# Altium PCB PCB.PcbDoc
Units mil, origin at the board's own origin, x right, y up, seen from the top; angles counter-clockwise.
Board outline 2387.59 x 420.45 mil, 2 copper layers (Top Layer, Bottom Layer), stack 21 mil thick; 4 components, 12 nets, 31 pads, 24 vias.
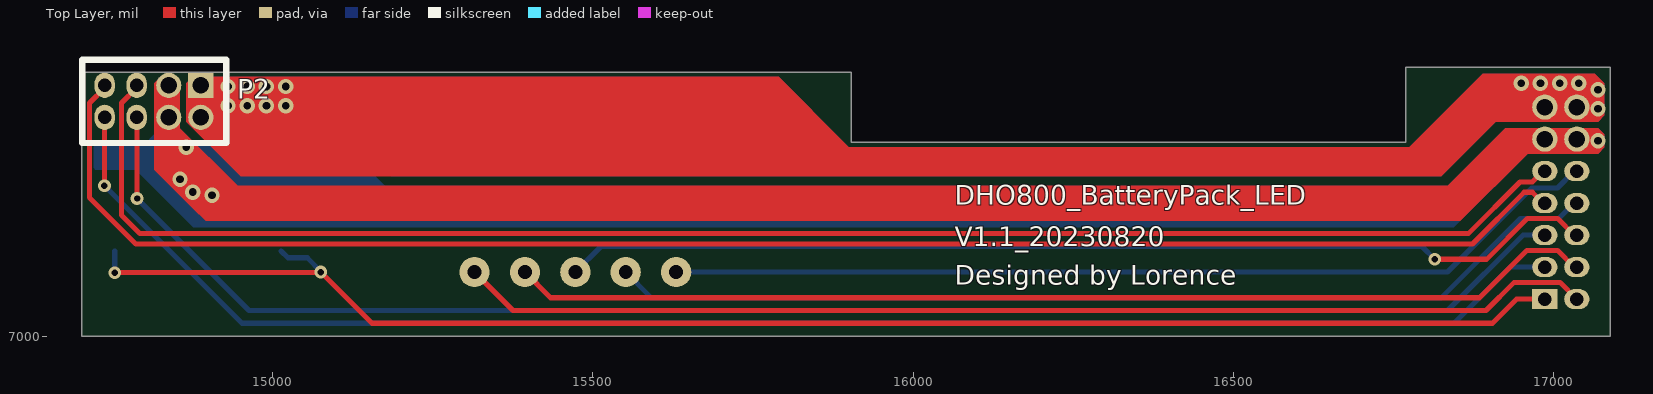
[diagram p0: Top Layer view]
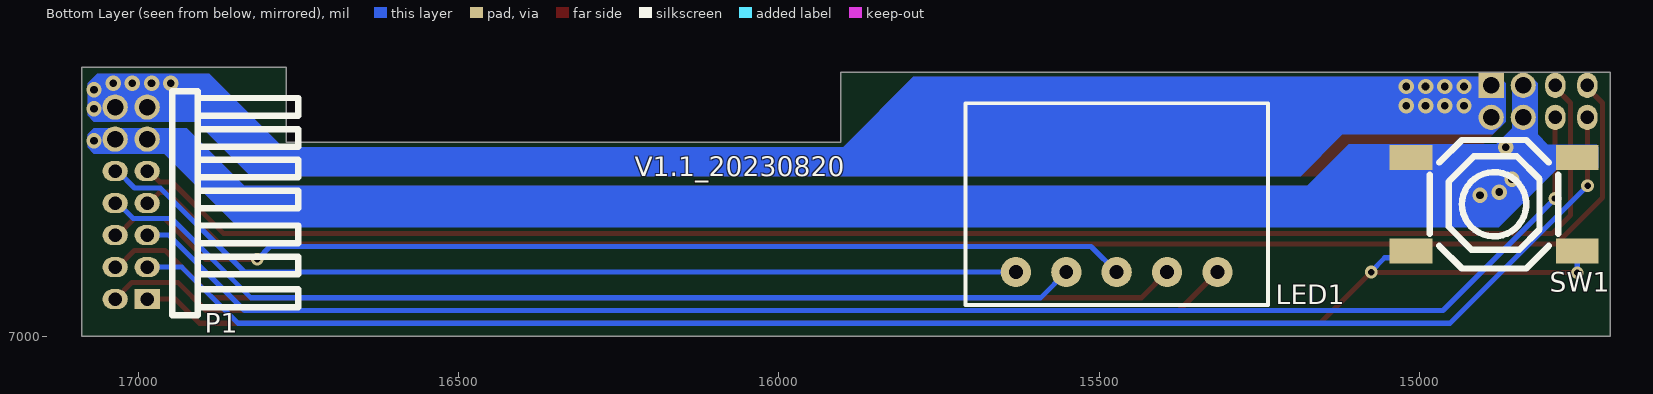
[diagram p1: Bottom Layer view, seen from below]

## Layer stack, top to bottom
Top Solder: solder mask 0.4, Solder Resist, Dk 3.5
Top Layer: signal copper 1.4
Dielectric 2: prepreg 2.8, PP-006, Dk 4.1
Dielectric 1: dielectric 12.6, FR-4, Dk 4.8
Dielectric 3: prepreg 2.8, PP-006, Dk 4.1
Bottom Layer: signal copper 1.4
Bottom Solder: solder mask 0.4, Solder Resist, Dk 3.5

## Board outline
14701.52,7236.79 14701.52,7412.46 15903.45,7412.46 15903.45,7302.51 16769.59,7302.51 16769.59,7420.33 17089.11,7420.33 17089.11,6999.88 14701.52,6999.88

## Design rules (kind name [scope] priority, off if disabled: settings)
Clearance [All] p1: gap=4 ignorepadtopadclearanceinfootprint=FALSE
DiffPairsRouting [All] p1: maxlimit=8 minlimit=8 mostfreqgap=8 toplayer_minwidth=8 toplayer_maxwidth=8 toplayer_prefwidth=8 bottomlayer_minwidth=8 bottomlayer_maxwidth=8 bottomlayer_prefwidth=8 maxuncoupledlength=500
HoleToHoleClearance [All] p1: gap=0 allowstackedmicrovias=TRUE
MinimumSolderMaskSliver [All] p1: minsoldermaskwidth=0
PlaneConnect [All] p1: planeconnectstyle=Direct reliefexpansion=20 reliefentries=4 reliefconductorwidth=10 reliefairgap=10
PolygonConnect [All] p1: connectstyle=Relief reliefconductorwidth=10 reliefentries=4 polygonreliefangle="90 Angle" airgapwidth=10
RoutingVias [All] p1: holewidth=10 width=20 viastyle="Through Hole" minholewidth=10 minwidth=20 maxholewidth=500 maxwidth=500
SilkToSilkClearance [All] p1: silktosilkclearance=0
SilkToSolderMaskClearance [IsPad] p1: minsilkscreentomaskgap=0 clearancetoexposedcopper=TRUE
SolderMaskExpansion [All] p1: expansion=4 istentingtop=FALSE
Width [All] p1: maxlimit=1000 minlimit=8 preferedwidth=8
24 further rules are at their usual default settings.

## Classes and differential pairs
differential pair BUSB: +BUSB_P -BUSB_N

## Components (designator, comment, footprint, x,y, rotation, side; value= is the part's Value field where it differs from the comment)
LED1 "188数码管" LED_188 15630,7100 r180 bottom locked
P1 "X1321WR-2x07J-C40D18" HDR-TH_14P-P1.27-H-M-R2-C7-S1.27-W7.5-N 17011.89,7207.72 r90 bottom locked
P2 "X1321WR-2x07J-C40D18" HDR-TH_8P-P1.27 14812.44,7366.72 r180 top locked
SW1 "TS-1187A-B-A-B" SW-SMD_4P-L5.1-W5.1-P3.70-LS6.5-TL-2 14883,7206 r0 bottom locked

## Footprints (in the part's own frame and the unit in brackets; to place one, negate y for a bottom-side part, rotate by r counter-clockwise, add the part's x,y. Pads: shape width x height; smd on the part's side, far side on the other; paste and mask are expansions set on the pad)
HDR-TH_8P-P1.27 [mm]
  rect 1x1 hole 0.65: 1(-1.905,-0.635)
  round 1 hole 0.65: 2(-1.905,0.635) 3(-0.635,-0.635) 4(-0.635,0.635)
  oval 0.8x1 hole 0.53: 5(0.635,-0.635) 6(0.635,0.635) 7(1.905,-0.635) 8(1.905,0.635)
  silkscreen extent -2.92,-1.65 2.79,1.65
HDR-TH_14P-P1.27-H-M-R2-C7-S1.27-W7.5-N [mm]
  rect 0.8x1 hole 0.53: 1(-3.81,-0.635)
  oval 0.8x1 hole 0.53: 2(-3.81,0.635) 3(-2.54,-0.635) 4(-2.54,0.635) 5(-1.27,-0.635) 6(-1.27,0.635) 7(0,-0.635) 8(0,0.635) 9(1.27,-0.635) 10(1.27,0.635)
  round 1 hole 0.65: 11(2.54,-0.635) 12(2.54,0.635) 13(3.81,-0.635) 14(3.81,0.635)
  silkscreen extent -4.44,-6.64 4.44,-1.63
LED_188 [mm] "188数码管"
  round 1.2 hole 0.55: 1(0,0) 2(2,0) 3(4,0) 4(6,0) 5(8,0)
  silkscreen extent -2,-1.3 10,6.7
SW-SMD_4P-L5.1-W5.1-P3.70-LS6.5-TL-2 [mm]
  rect 1.7x1 smd: 1(-3.3,1.85) 2(3.3,1.85) 3(-3.3,-1.85) 4(3.3,-1.85)
  silkscreen extent -2.55,-2.55 2.55,2.55

## Part data
P1: Current Rating (Max)=1A, JLCPCB Part Class="Extended Part", LCSC Part Name="1.27mm 2x7P 弯插 方针", Manufacturer="XKB Connectivity(中国星坤)", Operating Temperature Range=-40℃~+105℃, Voltage Rating (Max)=250V, Welding Temperature (Max)=260℃, Add into BOM=yes, Circluar Pins/Square Pins=方针, Contact Material=黄铜, Contact Plating=金, Convert to PCB=yes, Device=X1321WR-2x07J-C40D18, Insulation Height=1mm, Length of End Connection Pin=-, Length of Mating Pin=4mm, Manufacturer Part=X1321WR-2x07J-C40D18, Mounting Type=弯插, Name=X1321WR-2x07J-C40D18, Number of Pins=14, Number of Rows=2, Pin Structure=2x7P, Pitch=1.27mm, Row Spacing=1.27mm, Supplier=LCSC, Supplier Footprint=插件,P=1.27mm, Supplier Part=C2881827, Symbol=X1321WR-2X07J-C40D18
P2: library part 双排插针, "双排弯针2*4P", Current Rating (Max)=1A, JLCPCB Part Class="Extended Part", LCSC Part Name="1.27mm 2x7P 弯插 方针", Manufacturer="XKB Connectivity(中国星坤)", Operating Temperature Range=-40℃~+105℃, Voltage Rating (Max)=250V, Welding Temperature (Max)=260℃, Add into BOM=yes, Circluar Pins/Square Pins=方针, Contact Material=黄铜, Contact Plating=金, Convert to PCB=yes, Device=X1321WR-2x07J-C40D18, Insulation Height=1mm, Length of End Connection Pin=-, Length of Mating Pin=4mm, Manufacturer Part=X1321WR-2x07J-C40D18, Mounting Type=弯插, Name=X1321WR-2x07J-C40D18, Number of Pins=14, Number of Rows=2, Pin Structure=2x7P, Pitch=1.27mm, Row Spacing=1.27mm, Supplier=LCSC, Supplier Footprint=插件,P=1.27mm, Supplier Part=C2881827, Symbol=X1321WR-2X07J-C40D18
SW1: "按键", Actuator/Cap Color=金色, Contact Current=50mA, Insulation Resistance=-, JLCPCB Part Class="Basic Part", LCSC Part Name="5.1*5.1*1.5mm 立贴 轻触开关 防水金属头", Manufacturer="XKB Connectivity(中国星坤)", Operating Force=160gf, Operating Temperature=-30℃~+85℃, Voltage Rating (DC)=12V, Actuator Style=圆形按钮, Add into BOM=yes, Circuit=单刀单掷, Convert to PCB=yes, Datasheet=https://atta.szlcsc.com/upload/public/pdf/source/20200227/C318884_1F20165719E1C4CAA3E10C4C359C6E26.pdf, Device=TS-1187A-B-A-B, Manufacturer Part=TS-1187A-B-A-B, Mechanical Life=10万次, Mounting Style=立贴, Name=TS-1187A-B-A-B, Strike Gundam=否, Supplier=LCSC, Supplier Footprint=SMD, Supplier Part=C318884, Switch Height=1.5mm, Switch Length=5.1mm, Switch Width=5.1mm, Symbol=TS-1187A-B-A-B, With Lamp=无
LED1: Contributor=微雪智能, link=https://item.taobao.com/item.htm?spm=a230r.1.14.30.334f1cb7MZebUt&id=633499956474&ns=1&abbucket=12#detail, spicePre=U, spiceSymbolName=188数码管

## Via types
v1: diameter 24, hole 12, Top Layer to Bottom Layer, tented both sides, 19 vias
v2: diameter 20, hole 10, Top Layer to Bottom Layer, tented both sides, 5 vias

## Nets (pads, with @x,y where several pads share a name; then routed paths per layer and width w, separated by ;. In a path a pad name is that pad's centre, name@x,y a point inside that pad or via, vN(x,y) a via of type N, cw(c..) or ccw(c..) an arc to the next point about the centre after c; other vN are vias at no path point)
BUSB_N: P1.7 P2.7 | length 2528.9
  Top Layer w8: P2.7 14737.44,7387.77 14713.69,7364.03 14713.69,7216.31 14786,7144 16874,7144 16954.73,7224.73 16967.34,7224.73 16984.34,7207.73 P1.7
BUSB_P: P1.9 P2.5 | length 2488.3
  Top Layer w8: P2.5 14787.44,7387.77 14763.69,7364.03 14763.69,7188.93 14792.63,7160 16867.37,7160 16948.1,7240.73 16967.33,7240.73 16984.33,7257.73 P1.9
CC3: P1.5 P2.6 | length 2451
  Top Layer w8: P2.6 14787.72,7341.44 14787.72,7215.28 v2(14788,7215)
  Bottom Layer w8: P2.6@14787.44,7337.77 P2.6 ; v2(14788,7215) 14963,7040 16835,7040 16952.73,7157.73 P1.5
CC4: P1.3 P2.8 | length 2482.2
  Top Layer w8: v2(14737,7235) 14737.22,7235.22 14737.22,7341.5 P2.8
  Bottom Layer w8: v2(14737,7235) 14952,7020 16845,7020 16932.73,7107.73 P1.3
GND: P1.11 P1.12 P2.3 P2.4 SW1.3 SW1.4
  other v1: 14905,7220 14875,7225 14855,7245 14865,7295 17070,7305
KEY: P1.1 SW1.1 SW1.2 | length 2393.7
  Top Layer w8: v2(14753,7099) 14753.5,7099.5 15074.5,7099.5 v2(15075,7100) 15155,7020 16905,7020 16942.73,7057.73 P1.1
  Bottom Layer w8: v2(14753,7099) 14753,7133.08 SW1.1 ; SW1.2 15023.73,7122.35 15053.7,7122.35 15075,7101.05 v2(15075,7100)
LED1: LED1.1 P1.10 | length 1476.2
  Top Layer w8: P1.10 P1.10@17040.82,7257.73
  Bottom Layer w8: LED1.1 16835,7100 16966.47,7231.47 17006.7,7231.47 17032.95,7257.73 P1.10
LED2: LED1.2 P1.8 | length 1567.3
  Top Layer w8: P1.8@17032.95,7207.73 P1.8
  Bottom Layer w8: LED1.2 15591.26,7060 16825,7060 16948.98,7183.98 17009.2,7183.98 17032.95,7207.73 P1.8
LED3: LED1.3 P1.6 | length 1630.5
  Top Layer w8: v2(16815,7120) 16896.02,7120 16960,7183.98 17006.7,7183.98 17032.95,7157.73 P1.6
  Bottom Layer w8: LED1.3 15512.52,7140 16795,7140 v2(16815,7120) ; P1.6@17032.95,7157.73 P1.6
LED4: LED1.4 P1.4 | length 1701.2
  Top Layer w8: LED1.4 15433.78,7060 16885,7060 16958.98,7133.98 17006.7,7133.98 17032.95,7107.73 P1.4
LED5: LED1.5 P1.2 | length 1775.8
  Top Layer w8: LED1.5 15375.04,7040 16895,7040 16938.98,7083.98 17010.63,7083.98 P1.2
VIN: P1.13 P1.14 P2.1 P2.2
  other v1: 17070,7355 14930,7360 14960,7360 14990,7360 15020,7360 17070,7385 14930,7390 14960,7390 14990,7390 15020,7390 16950,7395 16980,7395 17010,7395 17040,7395

## Other copper
Top Layer:
  region net GND: 14875,7200 14895,7180 16855,7180 16960,7285 17070,7285 17080,7295 17080,7315 17070,7325 16925,7325 16835,7235 14945,7235 14855,7325 14855,7395 14845,7405 14825,7405 14815,7395 14815,7260
  region net VIN: 15790,7405 15895,7300 15900,7295 16775,7295 16780,7300 16890,7410 17065,7410 17080,7395 17080,7345 17070,7335 16910,7335 16825,7250 14950,7250 14880,7320 14865,7335 14865,7395 14875,7405
Bottom Layer:
  region net GND: 14815,7315 14799,7299 14723,7299 14720,7296 14720,7263 14723,7260 14786,7260 14876,7170 16845,7170 16960,7285 17070,7285 17080,7295 17080,7315 17070,7325 16925,7325 16835,7235 15175,7235 15110,7300 14880,7300 14855,7325 14855,7400 14850,7405 14825,7405 14815,7395
  region net VIN: 15790,7405 15895,7300 15900,7295 16775,7295 16780,7300 16890,7410 17065,7410 17080,7395 17080,7345 17070,7335 16910,7335 16825,7250 15185,7250 15120,7315 14885,7315 14865,7335 14865,7395 14875,7405

## Silkscreen, mask and mechanical layers (free items; w line width, h text height)
Top Overlay:
  text "DHO800_BatteryPack_LED" at 16065,7205 h30
  text "V1.1_20230820" at 16065,7140 h30
  text "Designed by Lorence" at 16065,7080 h30
Bottom Overlay:
  text "V1.1_20230820" at 16225,7250 h30
Top Solder:
  rectangle: 15125,7300 15490,7355
  rectangle: 15123.92,7180 15488.92,7235
Mechanical 1:
  lines w0.5: 14701.52,6999.88 17089.11,6999.88 17089.11,7420.33 16769.59,7420.33 16769.59,7302.51 16749.9,7302.51 16748.89,7302.51 15923.13,7302.51 15903.45,7302.51 15903.45,7412.46 14912.45,7412.46 14712.44,7412.46 14701.52,7412.46 14701.52,7299.79 14701.52,7236.79 14701.52,6999.88
Mechanical 2:
  drawing of 257 lines, arcs and shapes, not listed
Mechanical 3:
  drawing of 200 lines, arcs and shapes, not listed